# EAGLE board board2 (EAGLE 9.2.2)
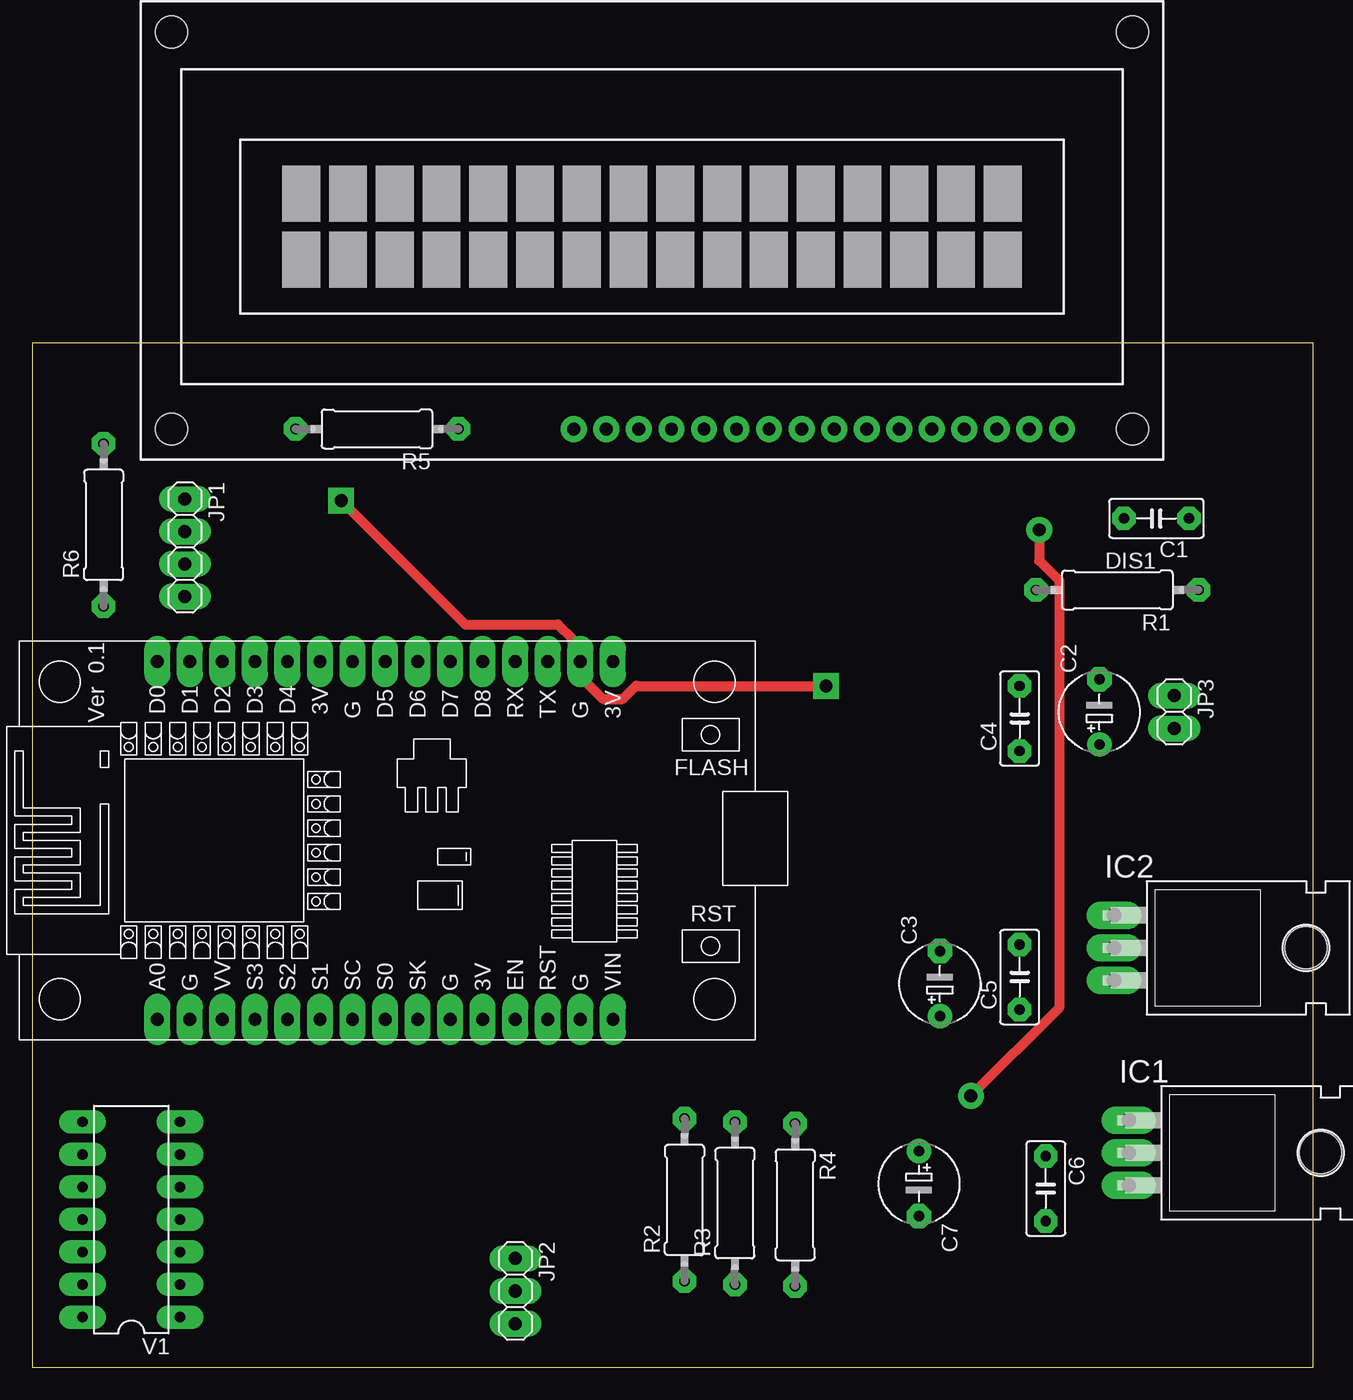
[diagram p0: board, top side]
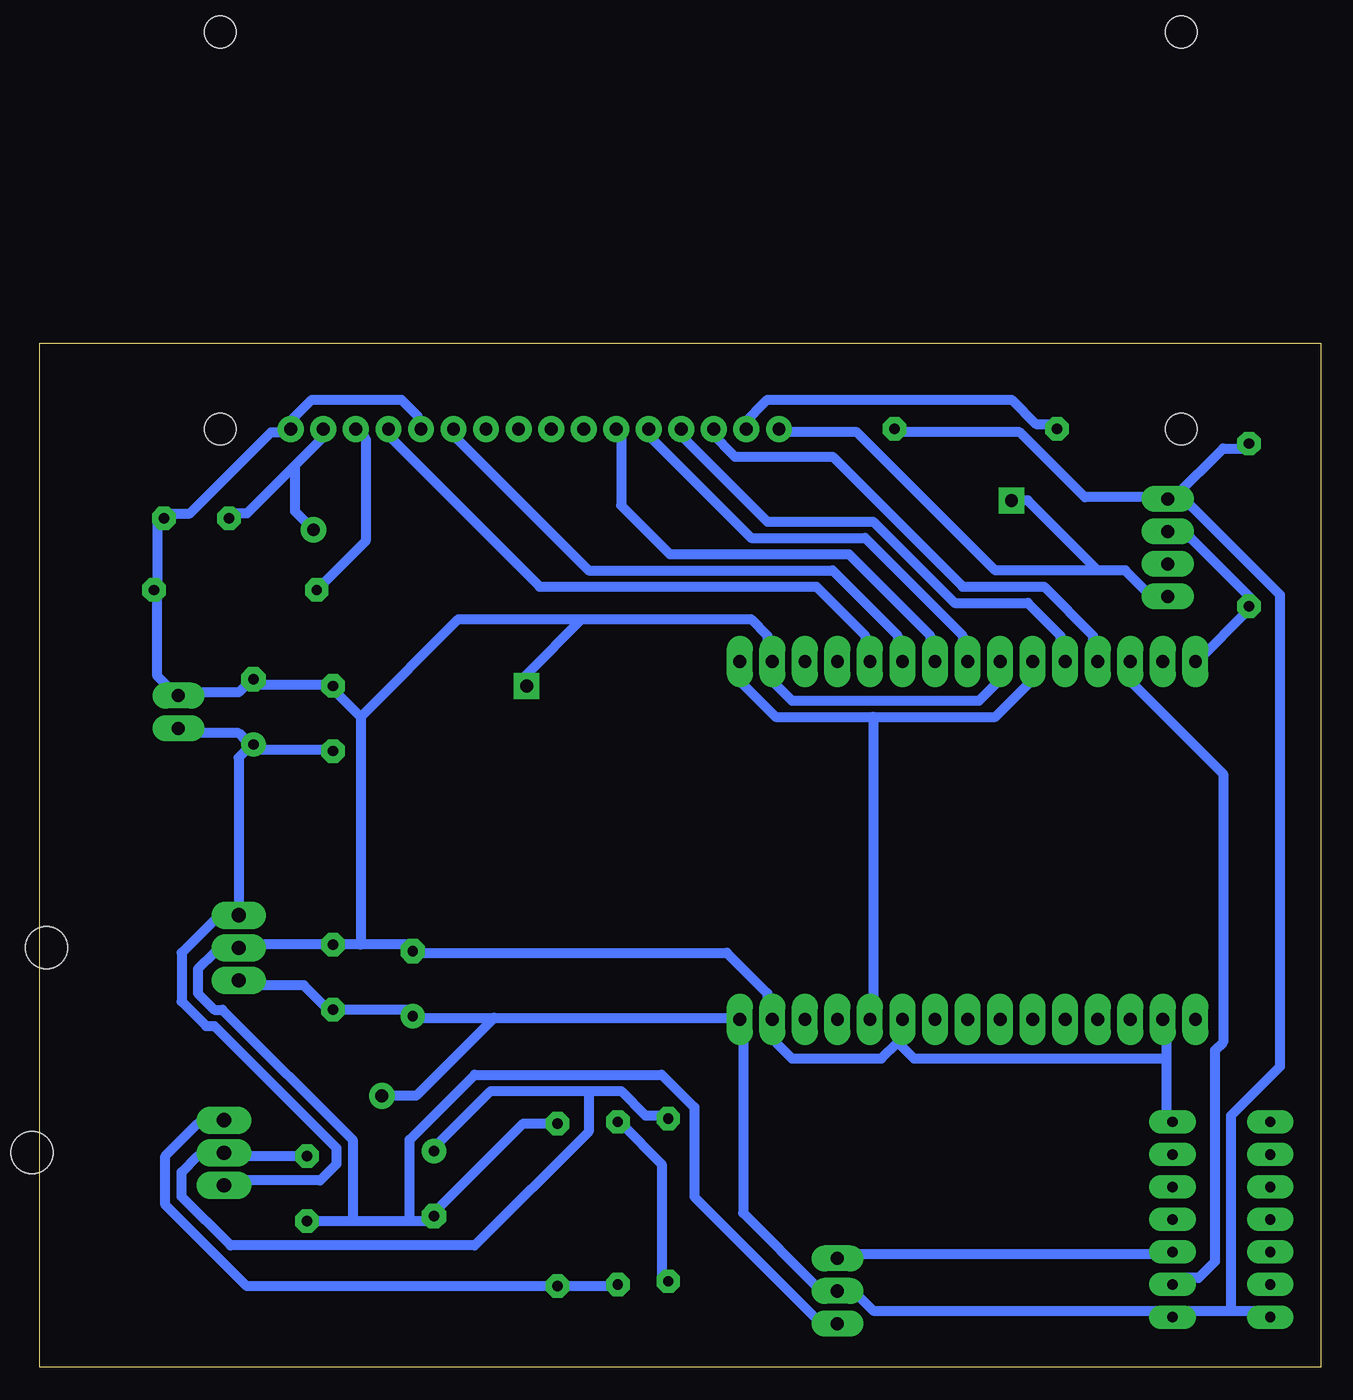
[diagram p1: board, bottom side, seen from below]

Size 100 x 80 mm. Coordinates in mm from the lower left corner, seen from the top.
Outline: 0,0 100,0 100,80 0,80 0,0
Copper layers (1*16): Top 0.035mm / dielectric 1.5mm / Bottom 0.035mm
Design rules "default *": minimum track width 30mil, minimum drill 0.35mm, track to track 20mil, track to pad 20mil, pad to pad 20mil, via to via 20mil, smd to smd 6mil, copper to edge 40mil, drill to drill 6mil, minimum pad ring 20mil, minimum via ring 8mil, stop-mask expansion 4mil, vias tented up to drill 0mil, thermal gap 10mil

## Footprints (pad centres in the part's own frame; a part is rotated, then mirrored left to right if it is on the bottom)
C5B3 = drill 0.813 pad 1.6 octagon: 1 -2.54,0; 2 2.54,0
E5-6 = drill 0.813 pad 1.905: + -2.54,0 | drill 0.813 pad 1.905 octagon: - 2.54,0
TUXGR_16X2_R2 = drill 1 pad 1.676: 1 -32,15.5; 2 -29.46,15.5; 3 -26.92,15.5; 4 -24.38,15.5; 5 -21.84,15.5; 6 -19.3,15.5; 7 -16.76,15.5; 8 -14.22,15.5; 9 -11.68,15.5; 10 -9.14,15.5; 11 -6.6,15.5; 12 -4.06,15.5; 13 -1.52,15.5; 14 1.02,15.5; 15 3.56,15.5; 16 6.1,15.5 | hole 2.5: -37.5,-15.5; 37.5,-15.5; -37.5,15.5; 37.5,15.5
TO220H = drill 1.118 long: 1 -2.54,-10.16; 2 0,-10.16; 3 2.54,-10.16 | hole 3.302: 0,4.826
1X04 = drill 1.016 long: 1 -3.81,0; 2 -1.27,0; 3 1.27,0; 4 3.81,0
1X03 = drill 1.016 long: 1 -2.54,0; 2 0,0; 3 2.54,0
1X02 = drill 1.016 long: 1 -1.27,0; 2 1.27,0
0309/12 = drill 0.813 octagon: 1 -6.35,0; 2 6.35,0
NODEMCU = drill 1 pad 1.676 long: 1 -13.97,17.78; 2 -13.97,15.24; 3 -13.97,12.7; 4 -13.97,10.16; 5 -13.97,7.62; 6 -13.97,5.08; 7 -13.97,2.54; 8 -13.97,0; 9 -13.97,-2.54; 10 -13.97,-5.08; 11 -13.97,-7.62; 12 -13.97,-10.16; 13 -13.97,-12.7; 14 -13.97,-15.24; 15 -13.97,-17.78; 16 13.97,-17.78; 17 13.97,-15.24; 18 13.97,-12.7; 19 13.97,-10.16; 20 13.97,-7.62; 21 13.97,-5.08; 22 13.97,-2.54; 23 13.97,0; 24 13.97,2.54; 25 13.97,5.08; 26 13.97,7.62; 27 13.97,10.16; 28 13.97,12.7; 29 13.97,15.24; 30 13.97,17.78
DIL14 = drill 0.813 long: 1 -7.62,-3.81; 2 -5.08,-3.81; 3 -2.54,-3.81; 4 0,-3.81; 5 2.54,-3.81; 6 5.08,-3.81; 7 7.62,-3.81; 8 7.62,3.81; 9 5.08,3.81; 10 2.54,3.81; 11 0,3.81; 12 -2.54,3.81; 13 -5.08,3.81; 14 -7.62,3.81

## Placement (x,y rotation side)
C1  100nF  [C5B3]  87.76,66.29 180 top
C2  47uF  [E5-6]  83.31,51.18 90 top
C3  10nF  [E5-6]  70.87,29.97 90 top
C4  100nF  [C5B3]  77.09,50.67 90 top
C5  100nF  [C5B3]  77.09,30.48 90 top
C6  100nF  [C5B3]  79.12,13.97 270 top
C7  10nF  [E5-6]  69.22,14.35 270 top
DIS1  TUXGR_16X2_R2  [TUXGR_16X2_R2]  48.39,88.77 180 top
IC1  317T  [TO220H]  95.76,16.76 270 top
IC2  7805T  [TO220H]  94.61,32.77 270 top
JP1  [1X04]  11.94,64.01 270 top
JP2  [1X03]  37.72,5.97 270 top
JP3  [1X02]  89.15,51.18 270 top
R1  2K2  [0309/12]  84.71,60.71 180 top
R2  120  [0309/12]  50.93,13.08 90 top
R3  120  [0309/12]  54.86,12.83 90 top
R4  390  [0309/12]  59.56,12.7 270 top
R5  33  [0309/12]  26.92,73.28 180 top
R6  10K  [0309/12]  5.59,65.79 90 top
U$1  NODEMCU  [NODEMCU]  27.56,41.15 90 top
V1  7408N  [DIL14]  7.75,11.56 90 top

## Library data of the parts
C1 C4-C6 = capacitor-wima; CAP: 100nF
C2 = rcl; SPICEPREFIX: 47uF
C3 C7 = rcl; SPICEPREFIX: 10uF
DIS1 = display-lcd; OC_FARNELL: unknown; OC_NEWARK: unknown
IC1 IC2 = linear
JP1-JP3 = pinhead
R1 = rcl; SPICEPREFIX: 2K2
R2 R3 = rcl; SPICEPREFIX: 120
R4 = rcl; SPICEPREFIX: 390
R5 = rcl; SPICEPREFIX: 33
R6 = rcl; SPICEPREFIX: 10k
U$1 = nodemcu
V1 = 74ttl-din

## Nets
3V: U$1.11 U$1.16 U$1.25
+3V3: C6.1 C7.+ IC1.2 R2.2
+5V: C1.2 C3.+ C5.1 DIS1.2 IC2.3 JP1.1 JP2.2 R5.1 R6.2 U$1.15 V1.1 V1.14
DATA_DHT: JP1.2 R6.1 U$1.30
GND: C1.1 C2.- C3.- C4.2 C5.2 C6.2 C7.- DIS1.1 DIS1.5 DIS1.16 IC2.2 JP1.4 JP2.3 JP3.1 R1.1 R4.1 U$1.2 U$1.10 U$1.14 U$1.17 U$1.24 V1.7
LCD_D4: DIS1.11 U$1.22
LCD_D5: DIS1.12 U$1.23
LCD_D6: DIS1.13 U$1.26
LCD_D7: DIS1.14 U$1.27
LCD_E: DIS1.6 U$1.21
LCD_RS: DIS1.4 U$1.20
MOTOR: U$1.28 V1.2
N$1: DIS1.3 R1.2
N$2: JP2.1 V1.3
N$3: C2.+ C4.1 IC1.3 IC2.1 JP3.2
N$4: R2.1 R3.2
N$5: IC1.1 R3.1 R4.2
N$6: DIS1.15 R5.2

## Tracks (layer width: path | path; a pad name or v marks a point on that pad's centre or on a via)
3V
  Bottom 0.762: 34.92,50.8 42.55,50.8 45.09,53.34 45.09,54.61 U$1.16 | 34.92,50.8 25.4,50.8 22.86,53.34 22.86,54.61 U$1.25 | 34.92,50.8 34.92,27.3 U$1.11
+3V3
  Bottom 0.762: C6.1 85.09,16.51 IC1.2 85.72,16.51 87.63,16.51 88.9,15.24 88.9,13.34 85.09,9.53 66.04,9.53 57.15,18.41 57.15,21.59 | 57.15,21.59 64.77,21.59 69.22,17.14 C7.+ | 57.15,21.59 54.61,21.59 52.7,19.68 51.44,19.68 R2.2
+5V  (via drill 1 pad 2)
  Top 0.762: v78.61,65.41 78.61,63 80.16,61.45 80.16,28.09 v73.28,21.21
  Bottom 0.762: R6.2 5.71,71.75 7.62,71.75 11.43,67.94 JP1.1 | R5.1 33.02,73.03 23.5,73.03 18.41,67.94 12.06,67.94 JP1.1 | 6.99,4.45 11.43,4.45 V1.1 12.06,4.45 34.92,4.45 36.2,5.71 37.47,5.71 JP2.2 38.1,6.35 39.37,6.35 45.09,12.06 45.09,26.67 U$1.15 45.72,27.3 64.52,27.3 | 6.99,4.45 4.45,4.45 V1.14 | 64.52,27.3 70.48,27.3 C3.+ 71.12,27.94 C5.1 77.47,27.94 79.38,29.84 84.45,29.84 IC2.3 | 6.99,4.45 6.99,19.68 3.17,23.5 3.17,60.33 10.16,67.31 11.43,67.31 JP1.1 | 80.07,70.42 77.47,73.03 DIS1.2 | 80.07,70.42 83.82,66.67 85.09,66.67 C1.2 | 80.07,70.42 80.07,66.86 v78.61,65.41 | 64.52,27.3 70.61,21.21 v73.28,21.21
DATA_DHT
  Bottom 0.762: U$1.30 9.53,55.24 5.71,59.05 R6.1 5.08,59.69 10.16,64.77 11.43,64.77 JP1.2
GND  (via drill 1 pad 2)
  Top 0.762: v61.98,53.21 47.12,53.21 46.12,52.21 44.55,52.21 42.16,54.61 42.16,56.91 41.05,58.02 33.8,58.02 v24.13,67.69
  Bottom 0.762: R4.1 62.23,19.05 69.22,12.06 C7.- 69.22,11.43 71.12,11.43 | 71.12,11.43 75.56,11.43 | 75.56,11.43 C6.2 | 71.12,11.43 71.12,17.78 66.04,22.86 51.44,22.86 48.9,20.32 48.9,13.34 39.37,3.81 38.1,3.81 JP2.3 | 12.06,24.13 12.06,26.67 U$1.2 | 12.06,24.13 12.06,19.68 V1.7 | 33.02,25.4 33.02,26.67 U$1.10 33.02,25.4 | 33.02,25.4 34.29,24.13 41.27,24.13 42.55,25.4 42.55,26.67 U$1.14 43.18,27.3 43.18,29.21 46.35,32.38 70.48,32.38 C3.- 71.12,33.02 74.93,33.02 | 12.06,24.13 31.75,24.13 33.02,25.4 | U$1.24 25.4,54.61 25.4,53.34 26.67,52.07 41.27,52.07 42.55,53.34 42.55,54.61 U$1.17 43.18,55.24 43.18,57.15 44.45,58.42 57.66,58.42 | 74.93,33.02 C5.2 84.45,33.02 IC2.2 84.45,32.38 86.36,32.38 87.63,31.11 87.63,29.21 86.36,27.94 85.72,27.94 75.56,17.78 75.56,11.43 | DIS1.5 70.48,73.66 70.48,74.3 71.75,75.56 78.74,75.56 80.64,73.66 DIS1.1 80.64,73.03 81.92,73.03 88.27,66.67 90.17,66.67 C1.1 90.81,66.04 90.81,60.96 R1.1 90.81,60.33 90.81,53.98 89.53,52.7 JP3.1 88.9,52.7 84.45,52.7 83.82,53.34 C2.- 83.19,53.34 77.47,53.34 C4.2 76.83,52.7 74.93,50.8 | 74.93,50.8 74.93,33.02 | 57.66,58.42 67.31,58.42 74.93,50.8 | 17.4,62.23 15.24,62.23 13.34,60.33 12.06,60.33 JP1.4 | 17.4,62.23 25.4,62.23 36.2,73.03 41.91,73.03 DIS1.16 | 17.4,62.23 22.86,67.69 v24.13,67.69 24.26,67.69 | 57.66,58.42 61.98,54.1 v61.98,53.21 61.98,52.83
LCD_D4
  Bottom 0.762: U$1.22 30.48,55.24 30.48,57.15 36.83,63.5 50.8,63.5 54.61,67.31 54.61,73.03 DIS1.11
LCD_D5
  Bottom 0.762: U$1.23 27.94,55.24 27.94,57.15 35.56,64.77 44.45,64.77 52.7,73.03 DIS1.12
LCD_D6
  Bottom 0.762: U$1.26 20.32,55.24 20.32,57.15 22.86,59.69 28.57,59.69 34.92,66.04 43.18,66.04 50.16,73.03 DIS1.13
LCD_D7
  Bottom 0.762: U$1.27 17.78,55.24 17.78,57.15 21.59,60.96 27.94,60.96 38.1,71.12 45.72,71.12 47.62,73.03 DIS1.14
LCD_E
  Bottom 0.762: U$1.21 33.02,55.24 33.02,57.15 38.1,62.23 57.15,62.23 67.94,73.03 DIS1.6
LCD_RS
  Bottom 0.762: U$1.20 35.56,55.24 35.56,57.15 39.37,60.96 60.96,60.96 73.03,73.03 DIS1.4
MOTOR
  Bottom 0.762: V1.2 11.43,6.99 9.53,6.99 8.26,8.26 8.26,24.77 7.62,25.4 7.62,46.35 14.61,53.34 14.61,54.61 U$1.28
N$1
  Bottom 0.762: DIS1.3 74.55,72.52 74.55,64.52 R1.2
N$2
  Bottom 0.762: V1.3 12.06,8.89 37.47,8.89 JP2.1
N$3
  Bottom 0.762: C4.1 77.47,48.26 83.19,48.26 C2.+ | JP3.2 88.9,49.53 84.45,49.53 83.82,48.9 C2.+ | C2.+ 83.82,48.26 84.45,47.62 IC2.1 84.45,34.92 86.36,34.92 88.9,32.38 88.9,28.57 87,26.67 86.36,26.67 76.83,17.14 76.83,15.88 78.11,14.61 85.09,14.61 IC1.3
N$4
  Bottom 0.762: R2.1 51.44,6.99 51.44,15.88 54.61,19.05 R3.2
N$5
  Bottom 0.762: R3.1 55.24,6.35 R4.2 83.82,6.35 90.17,12.7 90.17,16.51 87.63,19.05 85.72,19.05 IC1.1
N$6
  Bottom 0.762: R5.2 20.95,73.66 22.23,73.66 24.13,75.56 43.18,75.56 45.09,73.66 DIS1.15